# Altium PCB PCB1.PcbDoc
Units mm, origin at the board's own origin, x right, y up, seen from the top; angles counter-clockwise.
Board outline 100 x 100 mm, 2 copper layers (Top Layer, Bottom Layer); 39 components, 78 nets, 258 pads, 0 vias.
Unrouted connection lines stored in the file: 168.
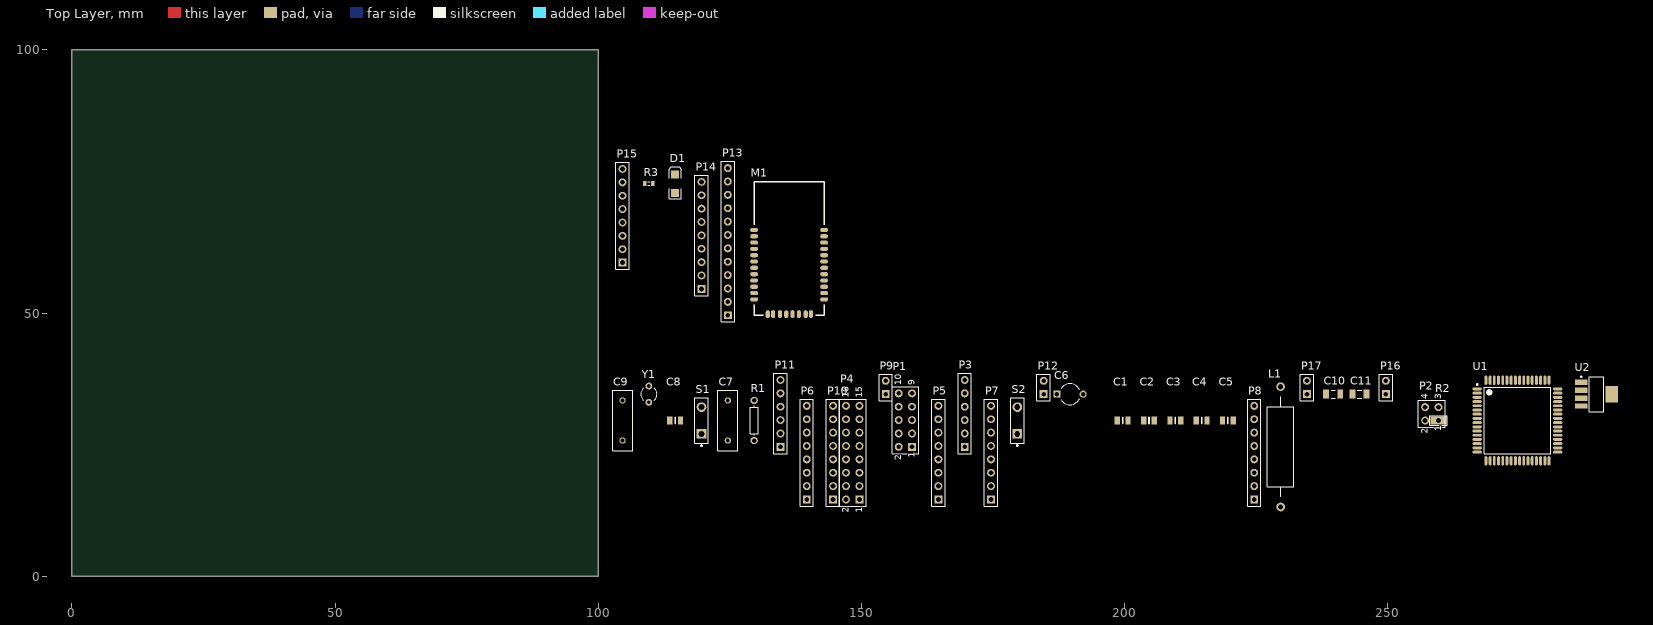
[diagram p0: Top Layer view]
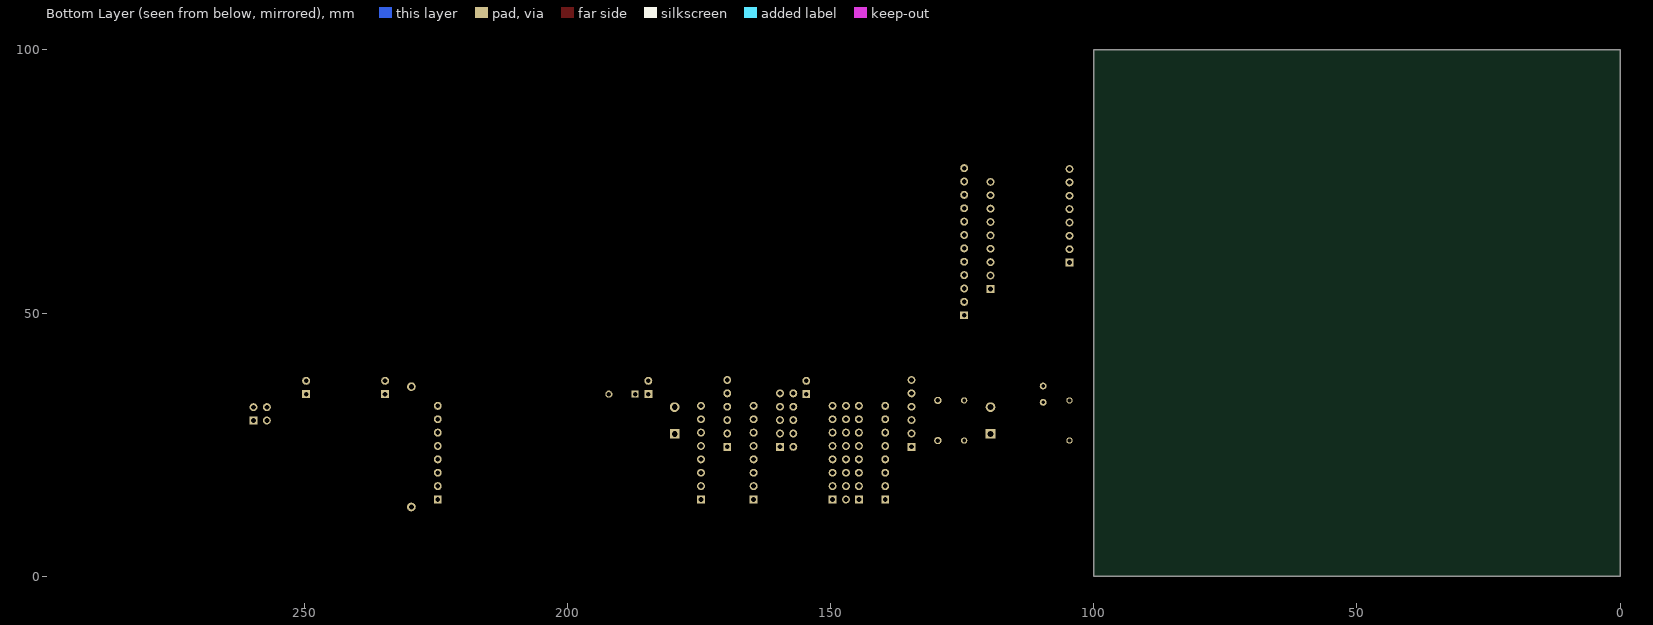
[diagram p1: Bottom Layer view, seen from below]

## Layer stack, top to bottom
Top Solder: solder mask 0.0102, Solder Resist, Dk 3.5
Top Layer: signal copper 0.0356
Dielectric 1: dielectric 0.32, FR-4, Dk 4.8
Bottom Layer: signal copper 0.0356
Bottom Solder: solder mask 0.0102, Solder Resist, Dk 3.5

## Board outline
0,0 100,0 100,50 100,100 0,100

## Design rules (kind name [scope] priority, off if disabled: settings)
Clearance [All] p1: gap=0.254
PolygonConnect [All] p1: connectstyle=Relief reliefconductorwidth=0.254 reliefentries=4 polygonreliefangle="90 Angle" airgapwidth=0.254
RoomDefinition Sheet2 [InComponentClass('Sheet2')] p1: confinementstyle=ConfineIn formatcopy=TRUE lockcomponents=FALSE outline 99.6,44.6 144.6,44.6 144.6,84.6 99.6,84.6
RoomDefinition Sheet1 [InComponentClass('Sheet1')] p2: confinementstyle=ConfineIn formatcopy=TRUE lockcomponents=FALSE outline 99.6,9.6 294.6,9.6 294.6,44.6 99.6,44.6
RoutingVias [All] p1: holewidth=0.711 width=1.27 viastyle="Through Hole" minholewidth=0.711 minwidth=1.27 maxholewidth=0.711 maxwidth=1.27
SolderMaskExpansion [All] p1: expansion=0.102
Width [All] p1: maxlimit=0.25 minlimit=0.25 preferedwidth=0.25
30 further rules are at their usual default settings.

## Classes and differential pairs
component class Sheet2: D1 M1 P13 P14 P15 R3
component class Sheet1: C1 C2 C3 C4 C5 C6 C7 C8 C9 C10 C11 L1 P1 P2 P3 P4 P5 P6 P7 P8 P9 P10 P11 P12 P16 P17 R1 R2 S1 S2 U1 U2 Y1

## Components (designator, comment, footprint, x,y, rotation, side; value= is the part's Value field where it differs from the comment)
C1 "0.10µF" SMD-0805C 199.6,29.6 r90 top
C2 "0.10µF" SMD-0805C 204.6,29.6 r90 top
C3 "0.10µF" SMD-0805C 209.6,29.6 r90 top
C4 "0.10µF" SMD-0805C 214.6,29.6 r90 top
C5 "0.10µF" SMD-0805C 219.6,29.6 r90 top
C6 "Cap2" CAPR5-4X5 189.6,34.6 r0 top
C7 "Cap" RAD-0.3 124.6,29.6 r90 top
C8 "0.10µF" SMD-0805C 114.6,29.6 r90 top
C9 "Cap" RAD-0.3 104.6,29.6 r90 top
C10 "Cap Semi" C1206 239.6,34.6 r0 top
C11 "Cap Semi" C1206 244.6,34.6 r0 top
D1 "LED2" 3.2X1.6X1.1 114.6,74.6 r90 top
L1 "Inductor Iron" AXIAL-0.9 229.6,24.6 r90 top
M1 "RN42 Module" RN42-LAND 129.6,49.6 r0 top
P1 "JTAG" HDR2X5 159.6,24.6 r90 top
P2 "Header 2X2" HDR2X2 259.6,29.6 r90 top
P3 "Header 6" HDR1X6 169.6,24.6 r90 top
P4 "Header 8X2" HDR2X8 149.6,14.6 r90 top
P5 "Header 8" HDR1X8 164.6,14.6 r90 top
P6 "Header 8" HDR1X8 139.6,14.6 r90 top
P7 "Header 8" HDR1X8 174.6,14.6 r90 top
P8 "Header 8" HDR1X8 224.6,14.6 r90 top
P9 "Header 2" HDR1X2 154.6,34.6 r90 top
P10 "Header 8" HDR1X8 144.6,14.6 r90 top
P11 "Header 6" HDR1X6 134.6,24.6 r90 top
P12 "Header 2" HDR1X2 184.6,34.6 r90 top
P13 "Header 12" HDR1X12 124.6,49.6 r90 top
P14 "Header 9" HDR1X9 119.6,54.6 r90 top
P15 "Header 8" HDR1X8 104.6,59.6 r90 top
P16 "Header 2" HDR1X2 249.6,34.6 r90 top
P17 "Header 2" HDR1X2 234.6,34.6 r90 top
R1 "Res1" AXIAL-0.3 129.6,29.6 r90 top
R2 "100" SMD-0805-RES 259.6,29.6 r90 top
R3 "Res3" J1-0603 109.6,74.6 r0 top
S1 "SW-PB" SPST-2 119.6,29.6 r90 top
S2 "SW-SPST" SPST-2 179.6,29.6 r90 top
U1 "ATxmega256A3B-AU" 64A_N 274.6,29.6 r0 top
U2 "LP38693MP-3.3/NOPB" MP05A_N 289.6,34.6 r0 top
Y1 "XTAL" R38 109.6,34.6 r0 top

## Footprints (in the part's own frame and the unit in brackets; to place one, negate y for a bottom-side part, rotate by r counter-clockwise, add the part's x,y. Pads: shape width x height; smd on the part's side, far side on the other; paste and mask are expansions set on the pad)
3.2X1.6X1.1 [mm] "SMT LED; 2 Flat Leads"
  rect 1.5x1.5 smd: 1(-1.75,0) 2(1.75,0)
  silkscreen extent -2.9,-1.15 3.2,1.15
64A_N [mm] "Thin QFP, 64-Leads, Body 14x14mm, Pitch 0.8mm, IPC Medium Density"
  oval 1.75x0.55 smd: 1(-7.65,6) 2(-7.65,5.2) 3(-7.65,4.4) 4(-7.65,3.6) 5(-7.65,2.8) 6(-7.65,2) 7(-7.65,1.2) 8(-7.65,0.4) 9(-7.65,-0.4) 10(-7.65,-1.2) 11(-7.65,-2) 12(-7.65,-2.8) 13(-7.65,-3.6) 14(-7.65,-4.4) 15(-7.65,-5.2) 16(-7.65,-6) 33(7.65,-6) 34(7.65,-5.2) 35(7.65,-4.4) 36(7.65,-3.6) 37(7.65,-2.8) 38(7.65,-2) 39(7.65,-1.2) 40(7.65,-0.4) 41(7.65,0.4) 42(7.65,1.2) 43(7.65,2) 44(7.65,2.8) 45(7.65,3.6) 46(7.65,4.4) 47(7.65,5.2) 48(7.65,6)
  oval 0.55x1.75 smd: 17(-6,-7.65) 18(-5.2,-7.65) 19(-4.4,-7.65) 20(-3.6,-7.65) 21(-2.8,-7.65) 22(-2,-7.65) 23(-1.2,-7.65) 24(-0.4,-7.65) 25(0.4,-7.65) 26(1.2,-7.65) 27(2,-7.65) 28(2.8,-7.65) 29(3.6,-7.65) 30(4.4,-7.65) 31(5.2,-7.65) 32(6,-7.65) 49(6,7.65) 50(5.2,7.65) 51(4.4,7.65) 52(3.6,7.65) 53(2.8,7.65) 54(2,7.65) 55(1.2,7.65) 56(0.4,7.65) 57(-0.4,7.65) 58(-1.2,7.65) 59(-2,7.65) 60(-2.8,7.65) 61(-3.6,7.65) 62(-4.4,7.65) 63(-5.2,7.65) 64(-6,7.65)
  silkscreen extent -7.77,-6.35 6.35,6.95, body extent -7,-7 7,7, height 1.2
AXIAL-0.3 [mm] "Axial Device, Thru-Hole; 2 Leads; 0.3 in Pin Spacing"
  round 1.4 hole 0.85: 1(-3.81,0) 2(3.81,0)
  silkscreen extent -2.77,-0.76 2.77,0.76
AXIAL-0.9 [mm] "Axial Device, Thru-Hole; 2 Leads; 0.9 in Pin Spacing"
  round 1.65 hole 1: 1(-11.43,0) 2(11.43,0)
  silkscreen extent -9.53,-2.54 9.53,2.54
C1206 [mm] "Chip Capacitor, Body 3.2x1.6mm, IPC High Density"
  rect 1.1x1.7 smd: 1(-1.35,0) 2(1.35,0)
  silkscreen extent -0.4,-0.75 0.4,0.75, body extent -1.7,-0.9 1.7,0.9, height 1.3
CAPR5-4X5 [mm] "Capacitor; 2 Leads"
  rect 1.35x1.35 hole 0.8: 1(-2.5,0)
  round 1.35 hole 0.8: 2(2.5,0)
  silkscreen extent -1.69,-2 1.82,2
HDR1X2 [mm] "Connector; Header; 2 Position"
  rect 1.5x1.5 hole 0.9: 1(0,0)
  round 1.5 hole 0.9: 2(2.54,0)
  silkscreen extent -1.27,-1.27 3.81,1.27
HDR1X6 [mm] "Connector; Header; 6 Position"
  rect 1.5x1.5 hole 0.9: 1(0,0)
  round 1.5 hole 0.9: 2(2.54,0) 3(5.08,0) 4(7.62,0) 5(10.16,0) 6(12.7,0)
  silkscreen extent -1.27,-1.27 13.97,1.27
HDR1X8 [mm] "Connector; Header; 8 Position"
  rect 1.5x1.5 hole 0.9: 1(0,0)
  round 1.5 hole 0.9: 2(2.54,0) 3(5.08,0) 4(7.62,0) 5(10.16,0) 6(12.7,0) 7(15.24,0) 8(17.78,0)
  silkscreen extent -1.27,-1.27 19.05,1.27
HDR1X9 [mm] "Connector; Header; 9 Position"
  rect 1.5x1.5 hole 0.9: 1(0,0)
  round 1.5 hole 0.9: 2(2.54,0) 3(5.08,0) 4(7.62,0) 5(10.16,0) 6(12.7,0) 7(15.24,0) 8(17.78,0) 9(20.32,0)
  silkscreen extent -1.27,-1.27 21.59,1.27
HDR1X12 [mm] "Connector; Header; 12 Position"
  rect 1.5x1.5 hole 0.9: 1(0,0)
  round 1.5 hole 0.9: 2(2.54,0) 3(5.08,0) 4(7.62,0) 5(10.16,0) 6(12.7,0) 7(15.24,0) 8(17.78,0) 9(20.32,0) 10(22.86,0) 11(25.4,0) 12(27.94,0)
  silkscreen extent -1.27,-1.27 29.21,1.27
HDR2X2 [mm] "Connector; Header; 2x2 Position"
  rect 1.5x1.5 hole 0.9: 1(0,0)
  round 1.5 hole 0.9: 2(0,2.54) 3(2.54,0) 4(2.54,2.54)
  silkscreen extent -1.27,-1.27 3.81,3.81
HDR2X5 [mm] "Connector; Header; 5x2 Position"
  rect 1.5x1.5 hole 0.9: 1(0,0)
  round 1.5 hole 0.9: 2(0,2.54) 3(2.54,0) 4(2.54,2.54) 5(5.08,0) 6(5.08,2.54) 7(7.62,0) 8(7.62,2.54) 9(10.16,0) 10(10.16,2.54)
  silkscreen extent -1.27,-1.27 11.43,3.81
HDR2X8 [mm] "Connector; Header; 8x2 Position"
  rect 1.5x1.5 hole 0.9: 1(0,0)
  round 1.5 hole 0.9: 2(0,2.54) 3(2.54,0) 4(2.54,2.54) 5(5.08,0) 6(5.08,2.54) 7(7.62,0) 8(7.62,2.54) 9(10.16,0) 10(10.16,2.54) 11(12.7,0) 12(12.7,2.54) 13(15.24,0) 14(15.24,2.54) 15(17.78,0) 16(17.78,2.54)
  silkscreen extent -1.27,-1.27 19.05,3.81
J1-0603 [mm] "Chip Resistor, Body 1.6x0.8mm, IPC High Density"
  rect 0.7x0.9 smd: 1(-0.75,0) 2(0.75,0)
  silkscreen extent -0.2,-0.35 0.2,0.35, body extent -0.85,-0.48 0.85,0.48, height 0.9
MP05A_N [mm] "SOT223, 5-Leads, Body 6.5x3.5mm, Pitch 1.5mm, Lead Span 7mm, IPC Medium Density"
  rect 2.4x1 smd: 1(-2.9,2.25) 2(-2.9,0.75) 3(-2.9,-0.75) 4(-2.9,-2.25)
  rect 2.4x3.2 smd: 5(2.9,0)
  silkscreen extent -3.02,-3.35 1.4,3.42, body extent -1.86,-3.35 1.86,3.35, height 1.8
R38 [mm] "Crystal, Thru-Hole; 2 Leads; Body 3.1 x 8.2 mm (Dia.xH)"
  round 1.3 hole 0.7: 1(0,1.55) 2(0,-1.55)
  silkscreen extent -1.55,-1.19 1.55,1.17
RAD-0.3 [mm] "Radial Cap, Thru-Hole; 2 Leads; 0.3 in Pin Spacing"
  round 1.2 hole 0.7: 1(-3.81,0) 2(3.81,0)
  silkscreen extent -5.72,-1.91 5.71,1.91
RN42-LAND [mm] "RN42 Footprint"
  oval 1.5x0.8 smd: 1(0,16.2) 2(0,15) 3(0,13.8) 4(0,12.6) 5(0,11.4) 6(0,10.2) 7(0,9) 8(0,7.8) 9(0,6.6) 10(0,5.4) 11(0,4.2) 12(0,3) 13(13.3,3) 14(13.3,4.2) 15(13.3,5.4) 16(13.3,6.6) 17(13.3,7.8) 18(13.3,9) 19(13.3,10.2) 20(13.3,11.4) 21(13.3,12.6) 22(13.3,13.8) 23(13.3,15) 24(13.3,16.2)
  oval 0.8x1.5 smd: 28(9.8,0.2) 29(3.6,0.2) 30(10.8,0.2) 31(8.5,0.2) 32(7.3,0.2) 33(6.1,0.2) 34(4.9,0.2) 35(2.6,0.2)
  silkscreen extent 0,0 13.3,25.4
SMD-0805-RES [mil]
  rect 60x40 smd: 1(0,40) 2(0,-40)
  silkscreen extent -35,-65 35,65, body extent -24,-39 26,39, height 31
SMD-0805C [mil]
  rect 60x40 smd: 1(0,40) 2(0,-40)
  silkscreen extent -25,0 25,0, body extent -25,-39 25,39, height 35
SPST-2 [mm] "Switch; 2 Leads"
  rect 1.85x1.85 hole 1.1: 1(-2.54,0)
  round 1.85 hole 1.1: 2(2.54,0)
  silkscreen extent -4.89,-1.27 4.28,1.27

## Part data
C1 C2 C3 C4 C5 C8: library part GCD21BR71H104KA01L, "CAP CER 0.1UF 50V X7R 0805"
C6 C7 C9: "Capacitor"
C10 C11: library part GCJ31CR71H225KA12L, "CAP CER 2.2UF 50V X7R 1206"
D1: "Typical RED, GREEN, YELLOW, AMBER GaAs LED"
L1: "Magnetic-Core Inductor"
M1: library part RN42MOD
P1: library part "Header 5X2", "Header, 5-Pin, Dual row"
P2: "Header, 2-Pin, Dual row"
P3 P11: "Header, 6-Pin"
P4: "Header, 8-Pin, Dual row"
P5 P6 P7 P8 P10 P15: "Header, 8-Pin"
P9 P12 P16 P17: "Header, 2-Pin"
P13: "Header, 12-Pin"
P14: "Header, 9-Pin"
R1 R3: "Resistor"
R2: library part ERJ-6ENF1000V, "RES SMD 100 OHM 1% 1/8W 0805"
S1: "Switch"
S2: "Single-Pole, Single-Throw Switch"
U1: "8/16-bit AVR XMEGA A3B Microcontroller, 1.6-3.6V, 32MHz, 256KB + 8KB Flash, 4KB EEPROM, 16KB SRAM, 64-pin TQFP, Industrial Grade (-40°C to 85°C), Pb-Free"
U2: "500mA Low Dropout CMOS Linear Regulators Stable with Ceramic Output Capacitors, 5-pin SOT-223, Pb-Free, 1000 Reel"
Y1: "Crystal Oscillator"

## Nets (pads, with @x,y where several pads share a name; then routed paths per layer and width w, separated by ;. In a path a pad name is that pad's centre, name@x,y a point inside that pad or via, vN(x,y) a via of type N, cw(c..) or ccw(c..) an arc to the next point about the centre after c; other vN are vias at no path point)
3V3: C1.2 C2.2 C3.2 C4.2 C5.2 C11.1 L1.1 M1.11 P1.4 P4.3 R1.2 U1.15 U1.25 U1.35 U1.45 U1.53 U2.3
ADSCLK: P3.6 P8.6 U1.31
ADSCS: P3.1 P8.5 U1.30
ADSDRY: P3.4 P8.1 U1.26
ADSMISO: P3.3 P8.7 U1.32
ADSMOSI: P3.2 P8.8 U1.33
ADSSTART: P3.5 P8.3 U1.28
AGND: C1.1 C2.1 C3.1 C4.1 C5.1 C6.2 C7.2 C8.1 C9.2 C10.1 C11.2 M1.1 M1.12 M1.28 M1.29 P1.2 P1.10 P2.4 P4.2 P4.16 P12.2 P15.2 P15.7 P16.1 P17.1 R2.1 R3.2 S1.1 U1.14 U1.24 U1.34 U1.44 U1.52 U1.60 U2.5
BAT: C10.2 S2.1 U2.1 U2.4
BL_CTS: M1.16 P11.6 P13.9 U1.41
BL_PCM_CLK: M1.7 P14.6
BL_PCM_IN: M1.9 P14.8
BL_PCM_OUT: M1.10 P14.9
BL_PCM_SYNC: M1.8 P14.7
BL_PIO2: M1.19 P13.6
BL_PIO3: M1.20 P10.1 P13.5 U1.46
BL_PIO4: M1.22 P10.2 P13.3 U1.47
BL_PIO5: D1.1 M1.21 P13.4
BL_PIO6: M1.3 P10.3 P14.2 U1.48
BL_PIO7: M1.4 P10.4 P14.3 U1.49
BL_RESET: M1.5 P11.1 P14.4 U1.36
BL_RTS: M1.15 P11.5 P13.10 U1.40
BL_RX: M1.13 P11.4 P13.12 U1.39
BL_SPI_CS: M1.23 P13.2
BL_SPI_MISO: M1.24 P13.1
BL_SPI_MOSI: M1.2 P14.1
BL_SPI_SCK: M1.6 P14.5
BL_TX: M1.14 P11.3 P13.11 U1.38
BL_USB_D+: M1.17 P13.8
BL_USB_D-: M1.18 P13.7
NetC6_1: C6.1 L1.2
NetC7_1: C7.1 U1.58 Y1.2
NetC9_1: C9.1 U1.59 Y1.1
NetD1_2: D1.2 R3.1
NetM1_30: M1.30 P15.1
NetM1_31: M1.31 P15.3
NetM1_32: M1.32 P15.4
NetM1_33: M1.33 P15.5
NetM1_34: M1.34 P15.6
NetM1_35: M1.35 P15.8
NetP2_2: P2.2 R2.2
NetP9_1: P9.1 U1.42
NetP9_2: P9.2 U1.43
NetP12_1: P12.1 S2.2
NetP16_2: P16.2 U1.61
NetP17_2: P17.2 U1.51
PA0: P6.1 U1.62
PA1: P6.2 U1.63
PA2: P6.3 U1.64
PA3: P6.4 U1.1
PA4: P6.5 U1.2
PA5: P6.6 U1.3
PA6: P6.7 U1.4
PA7: P6.8 U1.5
PB0: P5.1 U1.6
PB1: P5.2 U1.7
PB2: P5.3 U1.8
PB3: P5.4 U1.9
PC0: P2.1 P7.1 U1.16
PC1: P2.3 P7.2 U1.17
PC2: P7.3 U1.18
PC3: P7.4 U1.19
PD1: P8.2 U1.27
PD3: P8.4 U1.29
PDI: P10.8 U1.56
PE1: P11.2 U1.37
PF4: P10.5 U1.50
PF6: P10.6 U1.54
PF7: P10.7 U1.55
RESETN: C8.2 P1.6 R1.1 S1.2 U1.57
SDCS: P4.7 P7.5 U1.20
SDMISO: P4.13 P7.7 U1.22
SDMOSI: P4.9 P7.8 U1.23
SDSCK: P4.11 P7.6 U1.21
TCK: P1.1 P5.7 U1.12
TDI: P1.9 P5.6 U1.11
TDO: P1.3 P5.8 U1.13
TMS: P1.5 P5.5 U1.10
pads on no net: P1.7 P1.8 P4.1 P4.4 P4.5 P4.6 P4.8 P4.10 P4.12 P4.14 P4.15 U2.2

## Text inside footprints (layer, text, board x,y; h text height)
P1: Top Overlay "10" at 157.568,36.284 h1.27 r90; Top Overlay "9" at 160.108,36.284 h1.27 r90; Top Overlay "1" at 160.108,22.568 h1.27 r90; Top Overlay "2" at 157.568,22.06 h1.27 r90
P2: Top Overlay "1" at 260.108,27.568 h1.27 r90; Top Overlay "2" at 257.568,27.06 h1.27 r90; Top Overlay "4" at 257.568,33.664 h1.27 r90; Top Overlay "3" at 260.108,33.664 h1.27 r90
P4: Top Overlay "2" at 147.568,12.06 h1.27 r90; Top Overlay "1" at 150.108,12.06 h1.27 r90; Top Overlay "15" at 150.108,33.904 h1.27 r90; Top Overlay "16" at 147.568,33.904 h1.27 r90